# Altium PCB RemoteCntrl_1R3 - Copy.PcbDoc
Units mm, origin at the board's own origin, x right, y up, seen from the top; angles counter-clockwise.
Board outline 110.24 x 44.34 mm, 2 copper layers (Top Layer, Bottom Layer); 40 components, 28 nets, 138 pads, 52 vias.
Unrouted connection lines stored in the file: 1.
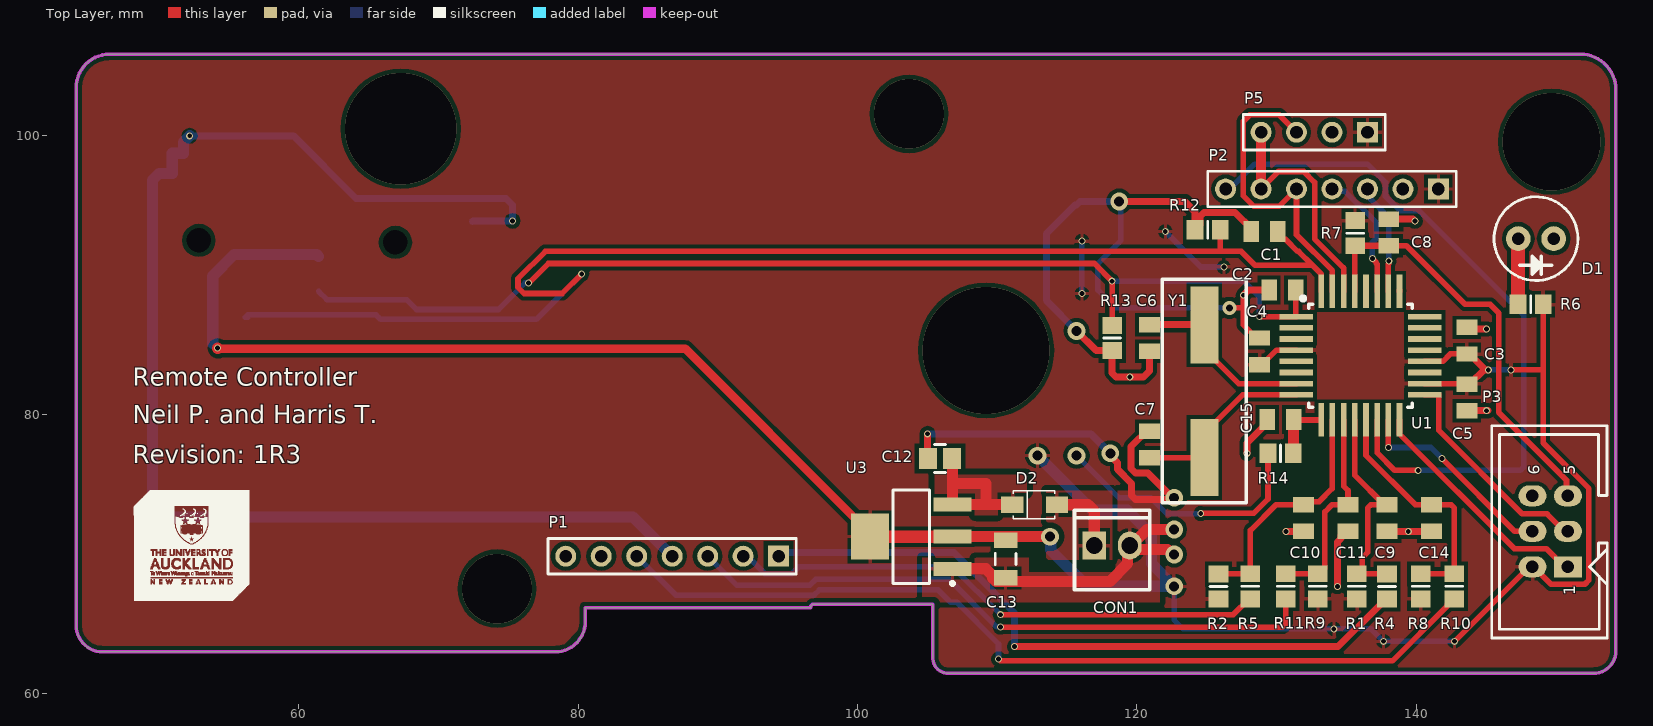
[diagram p0: Top Layer view]
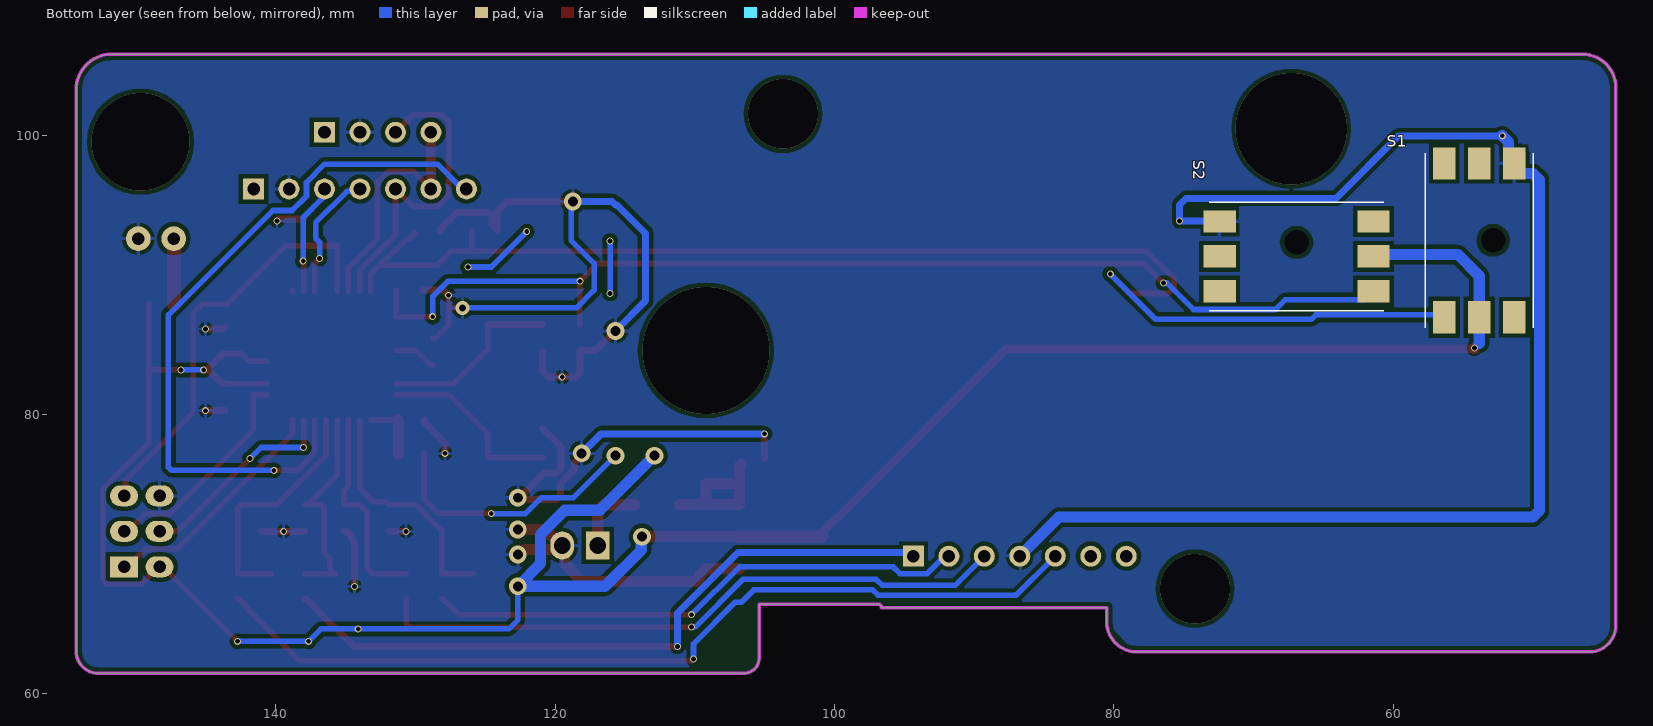
[diagram p1: Bottom Layer view, seen from below]

## Layer stack, top to bottom
Top Solder: solder mask 0.0102, Solder Resist, Dk 3.5
Top Layer: signal copper 0.0356
Dielectric 1: dielectric 0.32, FR-4, Dk 4.8
Bottom Layer: signal copper 0.0356
Bottom Solder: solder mask 0.0102, Solder Resist, Dk 3.5

## Board outline
45.974,62.992 cw(c45.974,64.897) 44.069,64.897 44.069,103.41 cw(c46.45,103.41) 46.45,105.791 151.765,105.791 cw(c151.765,103.251) 154.305,103.251 154.305,101.727 154.305,62.865 cw(c152.688,63.085) 152.467,61.468 106.54,61.468 cw(c106.488,62.546) 105.41,62.495 105.41,66.421 96.901,66.421 ccw(c96.901,66.167) 96.647,66.167 80.518,66.167 80.518,65.151 cw(c78.359,65.151) 78.359,62.992

## Design rules (kind name [scope] priority, off if disabled: settings)
Clearance Clearance_2 [InNamedPolygon('3V3_L01_P003') Or InNamedPolygon('9V_L01_P000') Or InNamedPolygon('GND_L01_P001') Or InNamedPolygon('NETC12_2_L01_P002') Or InNamedPolygon('GND_L02_P004')] p1: gap=0.4 ignorepadtopadclearanceinfootprint=FALSE
Clearance Clearance_1 [InNamedPolygon('3V3_L01_P003')] p2: gap=0.4 ignorepadtopadclearanceinfootprint=FALSE
Clearance [All] p3: gap=0.3 ignorepadtopadclearanceinfootprint=TRUE
HoleSize [All] p1: absolutevalues=TRUE maxlimit=8 minlimit=0.025 maxpercent=80.000 minpercent=20.000
PolygonConnect [All] p1: connectstyle=Relief reliefconductorwidth=0.254 reliefentries=4 polygonreliefangle="90 Angle" airgapwidth=0.254
RoutingVias [All] p1: holewidth=0.711 width=1.27 viastyle="Through Hole" minholewidth=0.5 minwidth=0.45 maxholewidth=0.711 maxwidth=1.27
SolderMaskExpansion [All] p1: expansion=0.102 istentingtop=FALSE
Width [All] p1: maxlimit=1 minlimit=0.4 preferedwidth=0.5
29 further rules are at their usual default settings.

## Components (designator, comment, footprint, x,y, rotation, side; value= is the part's Value field where it differs from the comment)
C1 "Capacitor 0805" C0805#1 129.159,93.091 r0 top
C2 "Capacitor 0805" C0805#1 130.429,88.9 r0 top
C3 "100n" C0805#1 143.637,85.278 r270 top
C4 "100n" C0805#1 128.778,84.516 r270 top
C5 "100n" C0805#1 143.637,81.219 r90 top
C6 "18p" C0805#1 120.904,85.471 r270 top
C7 "18p" C0805#1 120.904,77.851 r90 top
C8 "Capacitor 0805" C0805#1 138.049,93.025 r270 top
C9 "1u" C0805#1 137.922,72.583 r90 top
C10 "1u" C0805#1 131.953,72.583 r90 top
C11 "1u" C0805#1 135.128,72.583 r90 top
C12 "Capacitor 0805" C0805#2 105.918,76.835 r0 top value=?
C13 "Cap CER" C1206 110.617,69.647 r90 top value=2200nF/100V
C14 "1u" C0805#1 141.097,72.583 r90 top
C15 "Capacitor 0805" C0805#1 130.302,79.629 r0 top
CON1 "Header 2X1" HDR2X1_2P54 116.967,70.612 r90 top
D1 "Green" LED 148.59,92.583 r0 top
D2 "1N4148W-7-F" SOD123 112.649,73.533 r180 top
P1 "Header 7" HDR1X7 94.361,69.85 r180 top
P2 "Header 7" HDR1X7 141.605,96.139 r180 top
P3 "HDR3X2" HDR2X3_2P54 150.876,69.088 r90 top
P5 "Header 4" HDR1X4 136.525,100.203 r180 top
R1 "Resistor 0805" R0805 135.763,67.691 r270 top
R2 "Resistor 0805" R0805 125.857,67.68 r270 top
R4 "Resistor 0805" R0805 137.922,67.68 r270 top
R5 "Resistor 0805" R0805 128.143,67.691 r270 top
R6 "250R" R0805 148.209,87.884 r0 top
R7 "10k" R0805 135.636,92.975 r90 top
R8 "Resistor 0805" R0805 140.335,67.691 r270 top
R9 "Resistor 0805" R0805 132.969,67.691 r270 top
R10 "Resistor 0805" R0805 142.748,67.691 r270 top
R11 "Resistor 0805" R0805 130.683,67.691 r270 top
R12 "Resistor 0805" R0805 125.084,93.218 r0 top
R13 "Resistor 0805" R0805 118.237,85.471 r90 top
R14 "Resistor 0805" R0805 130.302,77.216 r0 top
S1 "ESB-33535A" ESB33535A 53.848,92.456 r90 bottom
S2 "ESB-33535A" ESB33535A 66.929,91.313 r0 bottom
U1 "ATMega328PB" TQFP32 136.017,84.201 r0 top
U3 "LDL1117S33R" SOT223L 103.857,71.247 r180 top value=3.3V/1.2A
Y1 "SMT-XTAL 16MHz" HC49-US 124.841,81.661 r270 top

## Footprints (in the part's own frame and the unit in brackets; to place one, negate y for a bottom-side part, rotate by r counter-clockwise, add the part's x,y. Pads: shape width x height; smd on the part's side, far side on the other; paste and mask are expansions set on the pad)
C0805#1 [mm]
  rect 1.1x1.5 smd: 1(-0.95,0) 2(0.95,0)
  body extent -1.1,-0.72 1.1,0.72, height 1.1
C0805#2 [mm]
  rect 1.3x1.5 smd: 1(-0.85,0) 2(0.85,0)
  silkscreen extent -0.4,-1 0.4,1, body extent -1.03,-0.63 1,0.64, height 0.65
C1206 [mm] "Chip Capacitor, Body 3.2x1.6mm, IPC High Density"
  rect 1.1x1.7 smd: 1(-1.35,0) 2(1.35,0)
  silkscreen extent -0.4,-0.75 0.4,0.75, body extent -1.6,-0.8 1.6,0.8, height 1.5
ESB33535A [mm]
  rect 2.3x1.6 smd: 1(-5.5,2.5) 2(-5.5,0) 3(-5.5,-2.5) 4(5.5,-2.5) 5(5.5,0) 6(5.5,2.5)
  round 0.875 hole 1.75 unplated: MH1(0,-1)
  silkscreen extent -6.25,-3.88 6.25,3.88, body extent -6.49,-3.88 6.49,3.88, height 12.6
HC49-US [mm] "20Mhz Crystal"
  rect 5.5x2 smd: 1(-4.75,0) 2(4.75,0)
  silkscreen extent -8,-3 8,3, body extent -4.77,-2.4 4.79,2.4, height 3.8
HDR1X4 [mm] "Connector; Header; 4 Position"
  rect 1.5x1.5 hole 0.9: 1(0,0)
  round 1.5 hole 0.9: 2(2.54,0) 3(5.08,0) 4(7.62,0)
  silkscreen extent -1.27,-1.27 8.89,1.27
HDR1X7 [mm] "Connector; Header; 7 Position"
  rect 1.5x1.5 hole 0.9: 1(0,0)
  round 1.5 hole 0.9: 2(2.54,0) 3(5.08,0) 4(7.62,0) 5(10.16,0) 6(12.7,0) 7(15.24,0)
  silkscreen extent -1.27,-1.27 16.51,1.27
HDR2X1_2P54 [mm] "Polarised Header 2 way"
  rect 2x1.7 hole 1.2: 1(0,0)
  oval 2x1.7 hole 1.2: 2(0,-2.54)
  silkscreen extent -3.16,-3.96 2.54,1.42, body extent -3.3,-3.64 3.17,1.44, height 7.39
HDR2X3_2P54 [mm] "IDC 3X2 Way 2.54 pitch"
  rect 1.5x2 hole 0.9: 1(0,0)
  oval 1.5x2 hole 0.9 paste+0: 2(0,2.54)
  oval 1.5x2 hole 0.9: 3(2.54,0) 4(2.54,2.54) 5(5.08,0) 6(5.08,2.54)
  silkscreen extent -5.1,-2.82 10.1,5.45, body extent -5.07,-3.17 10.17,6.28, height 9.1
LED [mil]
  round 70 hole 35.43: 1(-50,0) 2(50,0)
  silkscreen extent -118,-118 118,118, body extent -98,-98 98,98, height 413
R0805 [mm]
  rect 1.2x1.4 smd: 1(-0.9,0) 2(0.9,0)
  silkscreen extent 0,-0.6 0,0.6, body extent -1.07,-0.7 1.07,0.7, height 0.65
SOD123 [mm] "SOD-123; 2 Leads; Body 2.7 x 1.6 mm, (LxW)"
  rect 1.6x1.2 smd: 1(-1.65,0) 2(1.55,0)
  silkscreen extent -1.5,-1 1.5,1, body extent -1.8,-0.86 1.8,0.86, height 1.21
SOT223L [mm] "SOT223/SC73, 4-Leads, Body 6.5x3.5mm, Pitch 2.3mm, Lead Span 7mm, IPC Low Density"
  rect 2.7x1 smd: 1(-2.95,2.3) 2(-2.95,0) 3(-2.95,-2.3)
  rect 2.7x3.3 smd: 2(2.95,0)
  silkscreen extent -3.08,-3.35 1.3,3.47, body extent -3.65,-3.35 3.65,3.35, height 1.83
TQFP32 [mm]
  rect 2.4x0.4 smd: 1(-4.6,2.8) 2(-4.6,2) 3(-4.6,1.2) 4(-4.6,0.4) 5(-4.6,-0.4) 6(-4.6,-1.2) 7(-4.6,-2) 8(-4.6,-2.8) 17(4.6,-2.8) 18(4.6,-2) 19(4.6,-1.2) 20(4.6,-0.4) 21(4.6,0.4) 22(4.6,1.2) 23(4.6,2) 24(4.6,2.8)
  rect 0.4x2.4 smd: 9(-2.8,-4.6) 10(-2,-4.6) 11(-1.2,-4.6) 12(-0.4,-4.6) 13(0.4,-4.6) 14(1.2,-4.6) 15(2,-4.6) 16(2.8,-4.6) 25(2.8,4.6) 26(2,4.6) 27(1.2,4.6) 28(0.4,4.6) 29(-0.4,4.6) 30(-1.2,4.6) 31(-2,4.6) 32(-2.8,4.6)
  silkscreen extent -4.24,-3.7 3.7,4.24, body extent -3.5,-3.5 3.5,3.5, height 1.3

## Part data
C1 C2 C3 C4 C5 C6 C7 C8 C9 C10 C11 C14 C15: library part CCAP0805, "CCAP0805"
C12: library part CCAP0805, "CCAP0805", MPN=?, Part Description=?, Type="Surface Mount"
C13: library part "Cap CER Decoup C3216C0G2A104J160AC", "CAP CER 0.1UF 100V C0G 1206", Manufacturer="AVX Corporation", MPN=CL32B225KCJSNNE, Supplier Part Number 1=1276-3362-1-ND, Part Description="CAP CER 2.2UF 100V X7R 1210", Supplier 1=Digi-Key, Supplier 2=Arrow, Type="Surface mount"
CON1: library part HDR2X1
D1: library part LED_TH_2P54, "Typical throughole GaAs LED with 2.54mm pitch", Manufacturer="Generic Components", Class I=Optoelectronic, Class II=LED, Published=8-Jun-2000, Publisher="Altium Limited", Revision="July-2002: Re-released for DXP Platform."
D2: library part 1N4148_SMT_SOD123, "DIODE GEN PURP 100V 300MA SOD123", Base Part Number=1N4148W, Capacitance @ Vr, F="2pF @ 0V, 1MHz", Current - Average Rectified (Io)=150mA, Manufacturer="Diodes Incorporated", Manufacturer Part Number=1N4148W-13-F, Operating Temperature - Junction="-65°C ~ 150°C", Package / Case=SOD-123, Supplier Part Number 1=1N4148W-13FDICT-ND, Category="Discrete Semiconductor Products", ComponentLink1Description=https://www.diodes.com/assets/Datasheets/ds30086.pdf, ComponentLink1URL=https://www.diodes.com/assets/Datasheets/ds30086.pdf, Diode Type=Standard, Mounting Type="Surface Mount", Packaging="Cut Tape (CT)", Part Status=Active, Pricing 1="1=0.33, 10=0.292, 100=0.1586, 500=0.0976, 1000=0.06656 (NZD)", RoHS="RoHS Compliant", Speed="Small Signal =< 200mA (Io), Any Speed", Stock 1=5282, Supplier 1=Digi-Key, Supplier Device Package=SOD-123
P1 P2: "Header, 7-Pin", LatestRevisionDate=17-Jul-2002, LatestRevisionNote="Re-released for DXP Platform.", Publisher="Altium Limited"
P3: "Header, 3-Pin, Dual row"
P5: "Header, 4-Pin", LatestRevisionDate=17-Jul-2002, LatestRevisionNote="Re-released for DXP Platform.", Publisher="Altium Limited"
R1 R2 R4 R5 R6 R7 R8 R9 R10 R11 R12 R13 R14: library part RES0805, "RES0805"
S1 S2: "Switch", Manufacturer_Name=Panasonic, Mouser Part Number=667-ESB-33535A, Arrow Part Number=ESB-33535A, Arrow Price/Stock=https://www.arrow.com/en/products/esb-33535a/panasonic, Datasheet Link=https://industrial.panasonic.com/ac/cdn/e/control/switch/push/catalog/sw_pu_eng_esb33.pdf, Height=12.5mm, Manufacturer_Part_Number=ESB-33535A, Mouser Price/Stock=https://www.mouser.co.uk/ProductDetail/Panasonic/ESB-33535A?qs=bhLVwANLX8NKx9UGCqkFcQ%3D%3D
U1: "IC MCU 8BIT 32KB FLASH 32TQFP", Supplier Part Number 1=ATMEGA328PB-AU-ND, Supplier 1=Digi-Key, Supplier 2=Digikey, Supplier Part Number 2=ATMEGA328PB-AU-ND
U3: library part "LDO LDL1117S33R", "IC REG LINEAR 3.3V 1.2A SOT223", Manufacturer=STMicroelectronics, Supplier Part Number 1=2729708, MPN=LDL1117S33R, Part Description="IC REG LINEAR 3.3V 1.2A SOT223", Supplier 1=Element14, Supplier 2=Digi-Key, Supplier 3=Mouser, Supplier Part Number 2=497-17239-1-ND, Supplier Part Number 3=511-LDL1117S33R, Type="Surface mount"
Y1: library part TXC9C-16_XTAL_SMT, "9C-16.000MAAJ-T crystal 16.0000MHZ 18PF SMD", Frequency Stability=±30ppm, Load Capacitance=18pF, Manufacturer="TXC CORPORATION", Manufacturer Part Number=9C-16.000MAAJ-T, Operating Mode=Fundamental, Operating Temperature="-20°C ~ 70°C", Package / Case=HC-49/US, Ratings=-, Supplier Part Number 1=887-1059-1-ND, Category="Crystals, Oscillators, Resonators", ComponentLink1Description=http://www.txccorp.com/download/products/quartz_crystals/2015TXC_9C_32.pdf, ComponentLink1URL=http://www.txccorp.com/download/products/quartz_crystals/2015TXC_9C_32.pdf, Frequency Tolerance=±30ppm, Height - Seated (Max)="0.161\" (4.10mm)", Mounting Type="Surface Mount", Packaging="Cut Tape (CT)", Part Status=Active, Pricing 1="1=0.75, 10=0.628, 50=0.5656, 100=0.5026, 500=0.47744 (NZD)", RoHS="RoHS Compliant", Size / Dimension="0.449\" L x 0.189\" W (11.40mm x 4.80mm)", Stock 1=11514, Supplier 1=Digi-Key, Type="MHz Crystal"

## Via types
v1: diameter 0.5, hole 0.35, Top Layer to Bottom Layer, 36 vias
v2: diameter 1.27, hole 0.711, Top Layer to Bottom Layer, 10 vias
v3: diameter 5, hole 5, Top Layer to Bottom Layer, 2 vias
v4: diameter 9.1, hole 9.1, Top Layer to Bottom Layer, 1 vias
v5: diameter 8, hole 8, Top Layer to Bottom Layer, 1 vias
v6: diameter 1, hole 0.5, Top Layer to Bottom Layer, 1 vias
v7: diameter 7, hole 7, Top Layer to Bottom Layer, 1 vias

## Nets (pads, with @x,y where several pads share a name; then routed paths per layer and width w, separated by ;. In a path a pad name is that pad's centre, name@x,y a point inside that pad or via, vN(x,y) a via of type N, cw(c..) or ccw(c..) an arc to the next point about the centre after c; other vN are vias at no path point)
3V3: C3.2 C4.2 C5.2 C13.2 P2.1 P3.2 P5.1 R1.2 R2.2 R6.2 R7.2 R8.2 R9.2 S1.2 S2.2 U1.4 U1.18 U1.20 U3.2 | length 187.9
  Top Layer w0.4: C4.2 128.978,83.566 130.013,84.601 U1.4 ; U1.18 C5.2@143.605,82.201 ; U1.20 141.924,83.801 142.451,84.328 C3.2 ; v1(142.748,63.754) 142.75,63.754 148.084,69.088 P3.2 148.419,69.088 149.669,67.838 152.083,67.838 152.376,68.131 152.376,74.686 149.109,77.953 149.109,83.185 ; v1(146.812,83.185) 149.109,83.185 ; R6.2 149.109,83.185
  Top Layer w0.5: C5.2@143.605,82.201 143.869,82.201 144.853,83.185 v1@144.98,83.185 ; C3.2 143.837,84.328 v1@144.98,83.185 ; v1(145.173,83.185) v1@144.98,83.185
  Top Layer w0.6: v1@54.356,84.709 87.678,84.709 99.79,72.597 99.857,72.597 100.907,71.547 U3.2@100.907,71.247 ; v2@112.775,77.175 v2(112.903,77.047)
  Top Layer w0.8: v1(54.197,84.741) v1@54.229,84.709 ; U3.2@106.807,71.247 110.617,71.247 v2(113.792,71.247) ; P5.1 P5.1@136.816,99.912
  Top Layer w0.9: U3.2@100.907,71.247 U3.2@106.807,71.247
  Bottom Layer w0.4: 53.848,85.09 v1(54.197,84.741) ; v1(116.078,88.646) v1(116.078,92.424) ; v1(122.047,93.091) 124.587,90.551 v1(126.238,90.551) ; v2(122.682,67.691) 122.682,65.278 123.317,64.643 v1(134.112,64.643) 136.779,64.643 v1(137.668,63.754) v1(142.748,63.754) ; v1(145.173,83.185) v1(146.812,83.185)
  Bottom Layer w0.8: 53.848,85.09 53.848,89.916 55.372,91.44 61.302,91.44 S2.2 ; v2(112.903,77.047) 116.809,73.141 119.32,73.141 121.057,71.404 121.057,69.316 v2(122.682,67.691) 116.459,67.691 113.845,70.305 113.845,71.194 v2(113.792,71.247)
9V: CON1.1 D2.1 | length 5.3
  Top Layer w0.8: D2.1 116.498,73.533 116.967,73.064 CON1.1
BLE_RESET: P2.7 U1.14 | length 51.5
  Top Layer w0.4: U1.14 137.217,77.26 138.48,75.996 v1(140.158,75.996)
  Bottom Layer w0.4: P2.7 126.663,96.139 128.441,97.917 136.515,97.917 137.815,96.617 137.815,95.621 138.84,94.597 140.226,94.597 147.701,87.122 147.701,76.231 147.467,75.996 v1(140.158,75.996)
GND: C1.1 C2.1 C3.1 C4.1 C5.1 C6.2 C7.2 C8.1 C9.1 C10.1 C11.1 C12.1 C13.1 C14.1 C15.1 CON1.2 D1.2 P1.4 P2.2 P3.6 P5.2 R12.1 R13.1 S1.4 S2.4 U3.1 | length 224.7
  Top Layer w0.4: v6(126.641,87.63) 127.635,87.63 ; v1(127.635,88.531) 127.635,87.63 ; C4.1 128.578,85.466 127.635,86.409 127.635,87.63
  Top Layer w0.5: v1(105.029,78.613) 105.029,76.874 C12.1 ; v2(115.697,85.979) 117.105,84.571 R13.1 118.237,82.97 118.53,82.677 120.484,82.677 120.904,83.097 C6.2 ; v2(118.11,77.216) 118.11,77.046 118.618,76.538 118.618,76.073 119.634,75.057 119.634,74.207 119.927,73.914 v2@122.682,73.914 ; v2(118.745,95.25) 123.444,95.25 124.184,94.51 R12.1 124.534,93.568 124.534,94.175 124.827,94.468 127.032,94.468 128.209,93.291 C1.1 ; C7.2@120.904,79.001 119.604,77.701 119.604,76.123 119.926,75.801 120.795,75.801 122.563,74.033 v2(122.682,74.033) ; v1(127.635,88.531) 128.004,88.9 C2.1 ; v1(127.889,77.216) 127.889,77.966 129.352,79.429 C15.1 ; v1(130.683,71.628) 131.948,71.628 C10.1 ; v1(134.366,67.691) 134.366,70.871 134.628,71.133 134.628,71.333 134.928,71.633 C11.1 ; C9.1 137.927,71.628 v1(139.446,71.628) 141.092,71.628 C14.1 ; C8.1 138.054,93.98 139.782,93.98 v1(139.916,93.847) ; C5.1 143.651,80.283 143.669,80.264 v1@145.161,80.264 ; C3.1 143.661,86.252 143.806,86.106 v1(145.034,86.106)
  Top Layer w0.8: U3.1 109.198,68.947 109.667,68.478 109.667,68.297 109.917,68.047 110.617,68.047 118.085,68.047 119.354,69.316 CON1.2@119.354,70.459 ; v2(122.682,69.977) 122.555,69.977 122.204,70.328 119.485,70.328 CON1.2@119.354,70.459 ; v2(122.682,71.763) 120.752,71.763 119.447,70.459 CON1.2@119.354,70.459
  Bottom Layer w0.4: v2(118.745,95.25) 118.872,95.123 118.872,92.456 117.221,90.805 117.221,88.9 118.491,87.63 v6(126.641,87.63)
  Bottom Layer w0.5: v1(52.197,99.949) 59.627,99.949 64.104,95.471 74.836,95.471 75.311,94.996 v1(75.311,93.853) 72.469,93.853 S2.4 ; v1(105.029,78.613) 116.713,78.613 v2(118.11,77.216) ; v2(115.697,85.979) 113.538,88.138 113.538,92.964 115.57,94.996 115.697,94.996 115.951,95.25 v2(118.745,95.25)
  Bottom Layer w0.8: v1(52.197,99.949) 51.748,99.5 51.748,98.706 51.745,98.703 50.951,98.703 50.951,97.261 50.948,97.258 49.999,97.258 49.53,96.79 49.53,73.113 49.999,72.644 83.947,72.644 P1.4
  other v1: 145.034,80.264 119.507,82.677
HOST_CTS: P2.4 U1.27 | length 9.4
  Top Layer w0.4: v1(136.876,91.174) 136.876,91.147 137.16,90.863 137.16,90.805 137.217,90.748 U1.27
  Bottom Layer w0.4: P2.4 134.153,95.971 134.926,95.971 137.16,93.736 137.16,92.611 136.876,92.326 v1(136.876,91.174)
HOST_RTS: P2.3 U1.26 | length 8
  Top Layer w0.4: U1.26 138.017,90.746 138.049,90.778 v1(138.049,90.975)
  Bottom Layer w0.4: P2.3 136.735,95.929 136.735,95.421 138.049,94.107 v1(138.049,90.975)
HOST_RX: P2.6 P5.4 U1.30 | length 17.4
  Top Layer w0.4: P2.6 130.155,97.389 131.963,97.389 132.735,96.617 132.735,92.563 134.817,90.481 U1.30
  Top Layer w0.7: P2.6 P5.4
HOST_TX: P2.5 P5.3 U1.31 | length 22.9
  Top Layer w0.4: P5.3 130.195,101.453 128.103,101.453 127.635,100.985 127.635,95.641 128.387,94.889 130.195,94.889 P2.5 131.445,92.863 134.017,90.291 U1.31
MISO: P3.1 U1.16 | length 17
  Top Layer w0.4: U1.16 138.817,78.601 147.04,70.378 149.336,70.378 150.626,69.088 P3.1
MOSI: P3.4 U1.15 | length 14.8
  Top Layer w0.4: v1(138.017,77.629) U1.15 ; v1(141.859,76.835) 147.066,71.628 P3.4
  Bottom Layer w0.4: v1(138.017,77.629) 141.065,77.629 v1(141.859,76.835)
NetC12_2: C12.2 D2.2 U3.3 | length 11.2
  Top Layer w0.8: C12.2@106.68,76.454 106.807,76.327 106.807,75.057 ; D2.2 111.092,73.54 109.22,73.54 ; 106.807,75.057 108.966,75.057 109.22,75.057 109.22,73.54 ; 106.807,75.057 U3.3 106.814,73.54 109.22,73.54
NetD1_1: D1.1 R6.1 | length 4.7
  Top Layer w1: R6.1 147.315,87.889 147.315,92.578 D1.1
RESET: C8.2 P3.5 R7.1 U1.29 | length 30.7
  Top Layer w0.4: U1.29 135.617,92.056 R7.1 ; C8.2 139.319,92.075 143.51,87.884 145.302,87.884 145.923,87.263 145.923,80.137 150.776,75.284 150.776,74.268 P3.5
  Top Layer w0.5: R7.1 C8.2
SCK: P3.3 U1.17 | length 15.8
  Top Layer w0.4: U1.17 141.617,81.401 141.617,78.869 147.608,72.878 149.376,72.878 150.626,71.628 P3.3
V_ACCEL_1: P1.1 R4.2 | length 49.3
  Top Layer w0.5: v1(111.252,63.373) 134.423,63.373 137.013,65.963 137.013,65.971 137.822,66.78 R4.2
  Bottom Layer w0.5: P1.1 94.615,70.104 106.934,70.104 111.252,65.786 v1(111.252,63.373)
V_ACCEL_1_FLT: C9.2 R1.1 R4.1 U1.12 | length 15.8
  Top Layer w0.4: U1.12 135.617,75.638 137.722,73.533 C9.2 136.772,73.533 136.537,73.299 136.537,70.116 136.144,69.723 136.144,68.972 R1.1 137.911,68.591 R4.1
V_ACCEL_2: P1.2 R5.2 | length 38.9
  Top Layer w0.4: v1(110.236,65.659) 126.911,65.659 128.043,66.791 R5.2
  Bottom Layer w0.4: P1.2 92.119,69.85 93.369,68.6 95.318,68.6 95.806,69.088 106.807,69.088 v1(110.236,65.659)
V_ACCEL_2_FLT: C10.2 R2.1 R5.1 U1.10 | length 17.4
  Top Layer w0.4: R2.1 125.868,68.591 R5.1 128.143,71.692 129.984,73.533 C10.2 132.18,73.76 133.069,73.76 133.998,74.689 133.998,78.465 134.017,78.484 U1.10
V_ACCEL_3: P1.3 R11.2 | length 45.8
  Top Layer w0.4: v1(110.236,64.77) 130.449,64.77 130.683,65.004 R11.2
  Bottom Layer w0.4: P1.3 91.375,67.756 96.585,67.756 97.028,68.199 106.553,68.199 109.963,64.789 110.217,64.789 v1(110.236,64.77)
V_ACCEL_3_FLT: C11.2 R9.1 R11.1 U1.11 | length 15
  Top Layer w0.4: R11.1 133.069,68.591 133.469,68.991 133.469,73.019 133.983,73.533 C11.2 135.128,74.549 134.817,74.86 U1.11
V_ACCEL_4: P1.5 R10.2 | length 64.5
  Top Layer w0.4: v1(110.109,62.484) 110.236,62.357 138.303,62.357 142.248,66.302 142.248,66.391 142.648,66.791 R10.2
  Bottom Layer w0.4: P1.5 86.995,67.056 96.901,67.056 97.282,67.437 105.789,67.437 106.678,66.548 107.124,66.548 110.109,63.563 v1(110.109,62.484)
V_ACCEL_4_FLT: C14.2 R8.1 R10.1 U1.13 | length 17.5
  Top Layer w0.4: U1.13 136.417,77.07 139.954,73.533 142.514,73.533 142.748,73.299 R10.1 R8.1
V_MV_BWD: C2.2 R13.2 S2.1 U1.1 | length 79.4
  Top Layer w0.4: v1(76.454,89.408) 76.481,89.408 77.878,90.805 116.967,90.805 v1(118.237,89.535) R13.2 ; v1(128.778,86.995) 131.411,86.995 131.379,87.027 C2.2
  Bottom Layer w0.4: S2.1 62.029,88.213 67.733,88.213 68.433,87.513 74.305,87.513 76.2,89.408 v1(76.454,89.408) ; v1(118.237,89.535) 127.692,89.535 128.778,88.449 v1(128.778,86.995)
V_MV_FWD: C1.2 R12.2 S1.1 U1.32 | length 97
  Top Layer w0.4: v1(80.264,90.055) 78.867,88.658 76.143,88.658 75.704,89.097 75.704,89.719 77.659,91.674 124.072,91.674 125.984,91.674 ; R12.2 125.984,91.674 ; C1.2 130.109,92.891 130.459,92.541 130.659,92.541 131.526,91.674 ; 131.592,91.674 132.588,90.678 ; U1.32 133.217,90.049 132.588,90.678 ; 125.984,91.674 127.486,91.674 128.482,90.678 132.588,90.678
  Bottom Layer w0.4: S1.1 56.182,86.956 56.348,87.122 65.547,87.122 65.856,86.813 77.022,86.813 v1(80.264,90.055)
V_STR_CTRL: R14.1 | length 19.1
  Top Layer w0.4: v1(124.587,72.898) 124.606,72.917 128.378,72.917 129.402,73.941 R14.1
  Bottom Layer w0.4: v2(115.697,77.047) 118.703,74.041 120.999,74.041 122.142,72.898 v1(124.587,72.898)
V_STR_CTRL_FLT: C15.2 R14.2 U1.9 | length 4.5
  Top Layer w0.4: C15.2 131.28,79.601 U1.9
  Top Layer w0.8: R14.2@131.252,77.166 R14.2 131.227,77.241 131.227,79.604 C15.2
X1: C6.1 U1.7 Y1.1 | length 13.3
  Top Layer w0.4: Y1.1@124.827,86.421 124.827,84.675 127.301,82.201 U1.7
  Top Layer w0.5: C6.1 Y1.1@124.827,86.421
X2: C7.1 U1.8 Y1.2 | length 13.4
  Top Layer w0.4: C7.1 124.827,76.901 124.827,78.647 127.581,81.401 U1.8
pads on no net: P1.6 P1.7 S1.3 S1.5 S1.6 S1.MH1 S2.3 S2.5 S2.6 S2.MH1 U1.2 U1.3 U1.5 U1.6 U1.19 U1.21 U1.22 U1.23 U1.24 U1.25 U1.28
copper on no net: | length 0.1
  Top Layer w0.4: 138.817,88.801 138.817,88.9
  other v3: 74.204,67.521 103.704,101.521
  other v4: 109.22,84.582
  other v5: 67.31,100.457
  other v7: 149.704,99.521

## Polygon pours and split planes (outlines as drawn)
3V3 on Top Layer "3V3_L01_P011" (solid, remove dead copper, pour order 11): 46.013,62.946 cw(c46.013,64.851) 44.108,64.851 44.108,103.163 cw(c46.736,103.163) 46.736,105.791 151.765,105.791 cw(c151.765,103.213) 154.343,103.213 154.14,61.227 105.67,61.46 105.449,66.375 96.94,66.375 96.686,66.121 80.557,66.121 80.557,65.105 78.398,62.946
GND on Top Layer "GND_L01_P001" (solid, pour order 1): 118.491,69.418 118.491,68.707 112.268,68.707 112.268,69.723 104.648,69.723 104.648,66.548 121.666,66.548 121.666,74.549 118.491,74.549
NetC12_2 on Top Layer "NETC12_2_L01_P002" (solid, pour order 2): 105.537,72.771 112.141,72.771 112.141,75.565 112.268,75.692 105.537,75.692
9V on Top Layer "9V_L01_P000" (solid, pour order 0): 113.538,69.723 113.665,69.596 118.237,69.596 118.237,74.549 113.538,74.549
GND on Bottom Layer "GND_L02_P012" (solid, remove dead copper, pour order 12): 46.013,62.946 cw(c46.013,64.851) 44.108,64.851 44.108,103.163 cw(c46.736,103.163) 46.736,105.791 151.765,105.791 cw(c151.765,103.213) 154.343,103.213 154.344,61.468 105.449,61.468 105.449,66.375 96.94,66.375 96.686,66.121 80.557,66.121 80.557,65.105 78.398,62.946

## Keep-outs
Keep-Out Layer:
  lines w0.254: 44.069,64.897 ccw(c45.974,64.897) 45.974,62.992 78.359,62.992 ccw(c78.359,65.151) 80.518,65.151 80.518,66.167 96.647,66.167 cw(c96.901,66.167) 96.901,66.421 97.409,66.421 104.775,66.421 105.41,66.421 105.41,62.495 ccw(c106.488,62.546) 106.54,61.468 152.467,61.468 ccw(c152.688,63.085) 154.305,62.865 154.305,101.727 154.305,103.251 ccw(c151.765,103.251) 151.765,105.791 151.121,105.791 47.117,105.791 46.45,105.791 ccw(c46.45,103.41) 44.069,103.41 44.069,102.046 44.069,65.913 44.069,65.458 44.069,64.897

## Silkscreen, mask and mechanical layers (free items; w line width, h text height)
Top Overlay:
  drawing of 24 lines, arcs and shapes, not listed
  text "Remote Controller" at 48.133,82.041 h1.29
  text "Neil P. and Harris T." at 48.133,79.375 h1.29
  text "Revision: 1R3" at 48.133,76.504 h1.29

## Text inside footprints (layer, text, board x,y; h text height)
P3: Top Overlay "1" at 151.384,67.056 h0.8 r90; Top Overlay "5" at 151.384,75.692 h0.8 r90; Top Overlay "6" at 148.844,75.692 h0.8 r90